# Altium PCB Tigershark 3D R1.2.PcbDoc (part 3 of 3)
Units mil, origin at the board's own origin, x right, y up, seen from the top; angles counter-clockwise.
Board outline 6000 x 4500 mil, 4 copper layers (Top Layer, Groun Plane, Power Plane, Bottom Layer); 257 components, 247 nets, 1014 pads, 620 vias.
Unrouted connection lines stored in the file: 332.
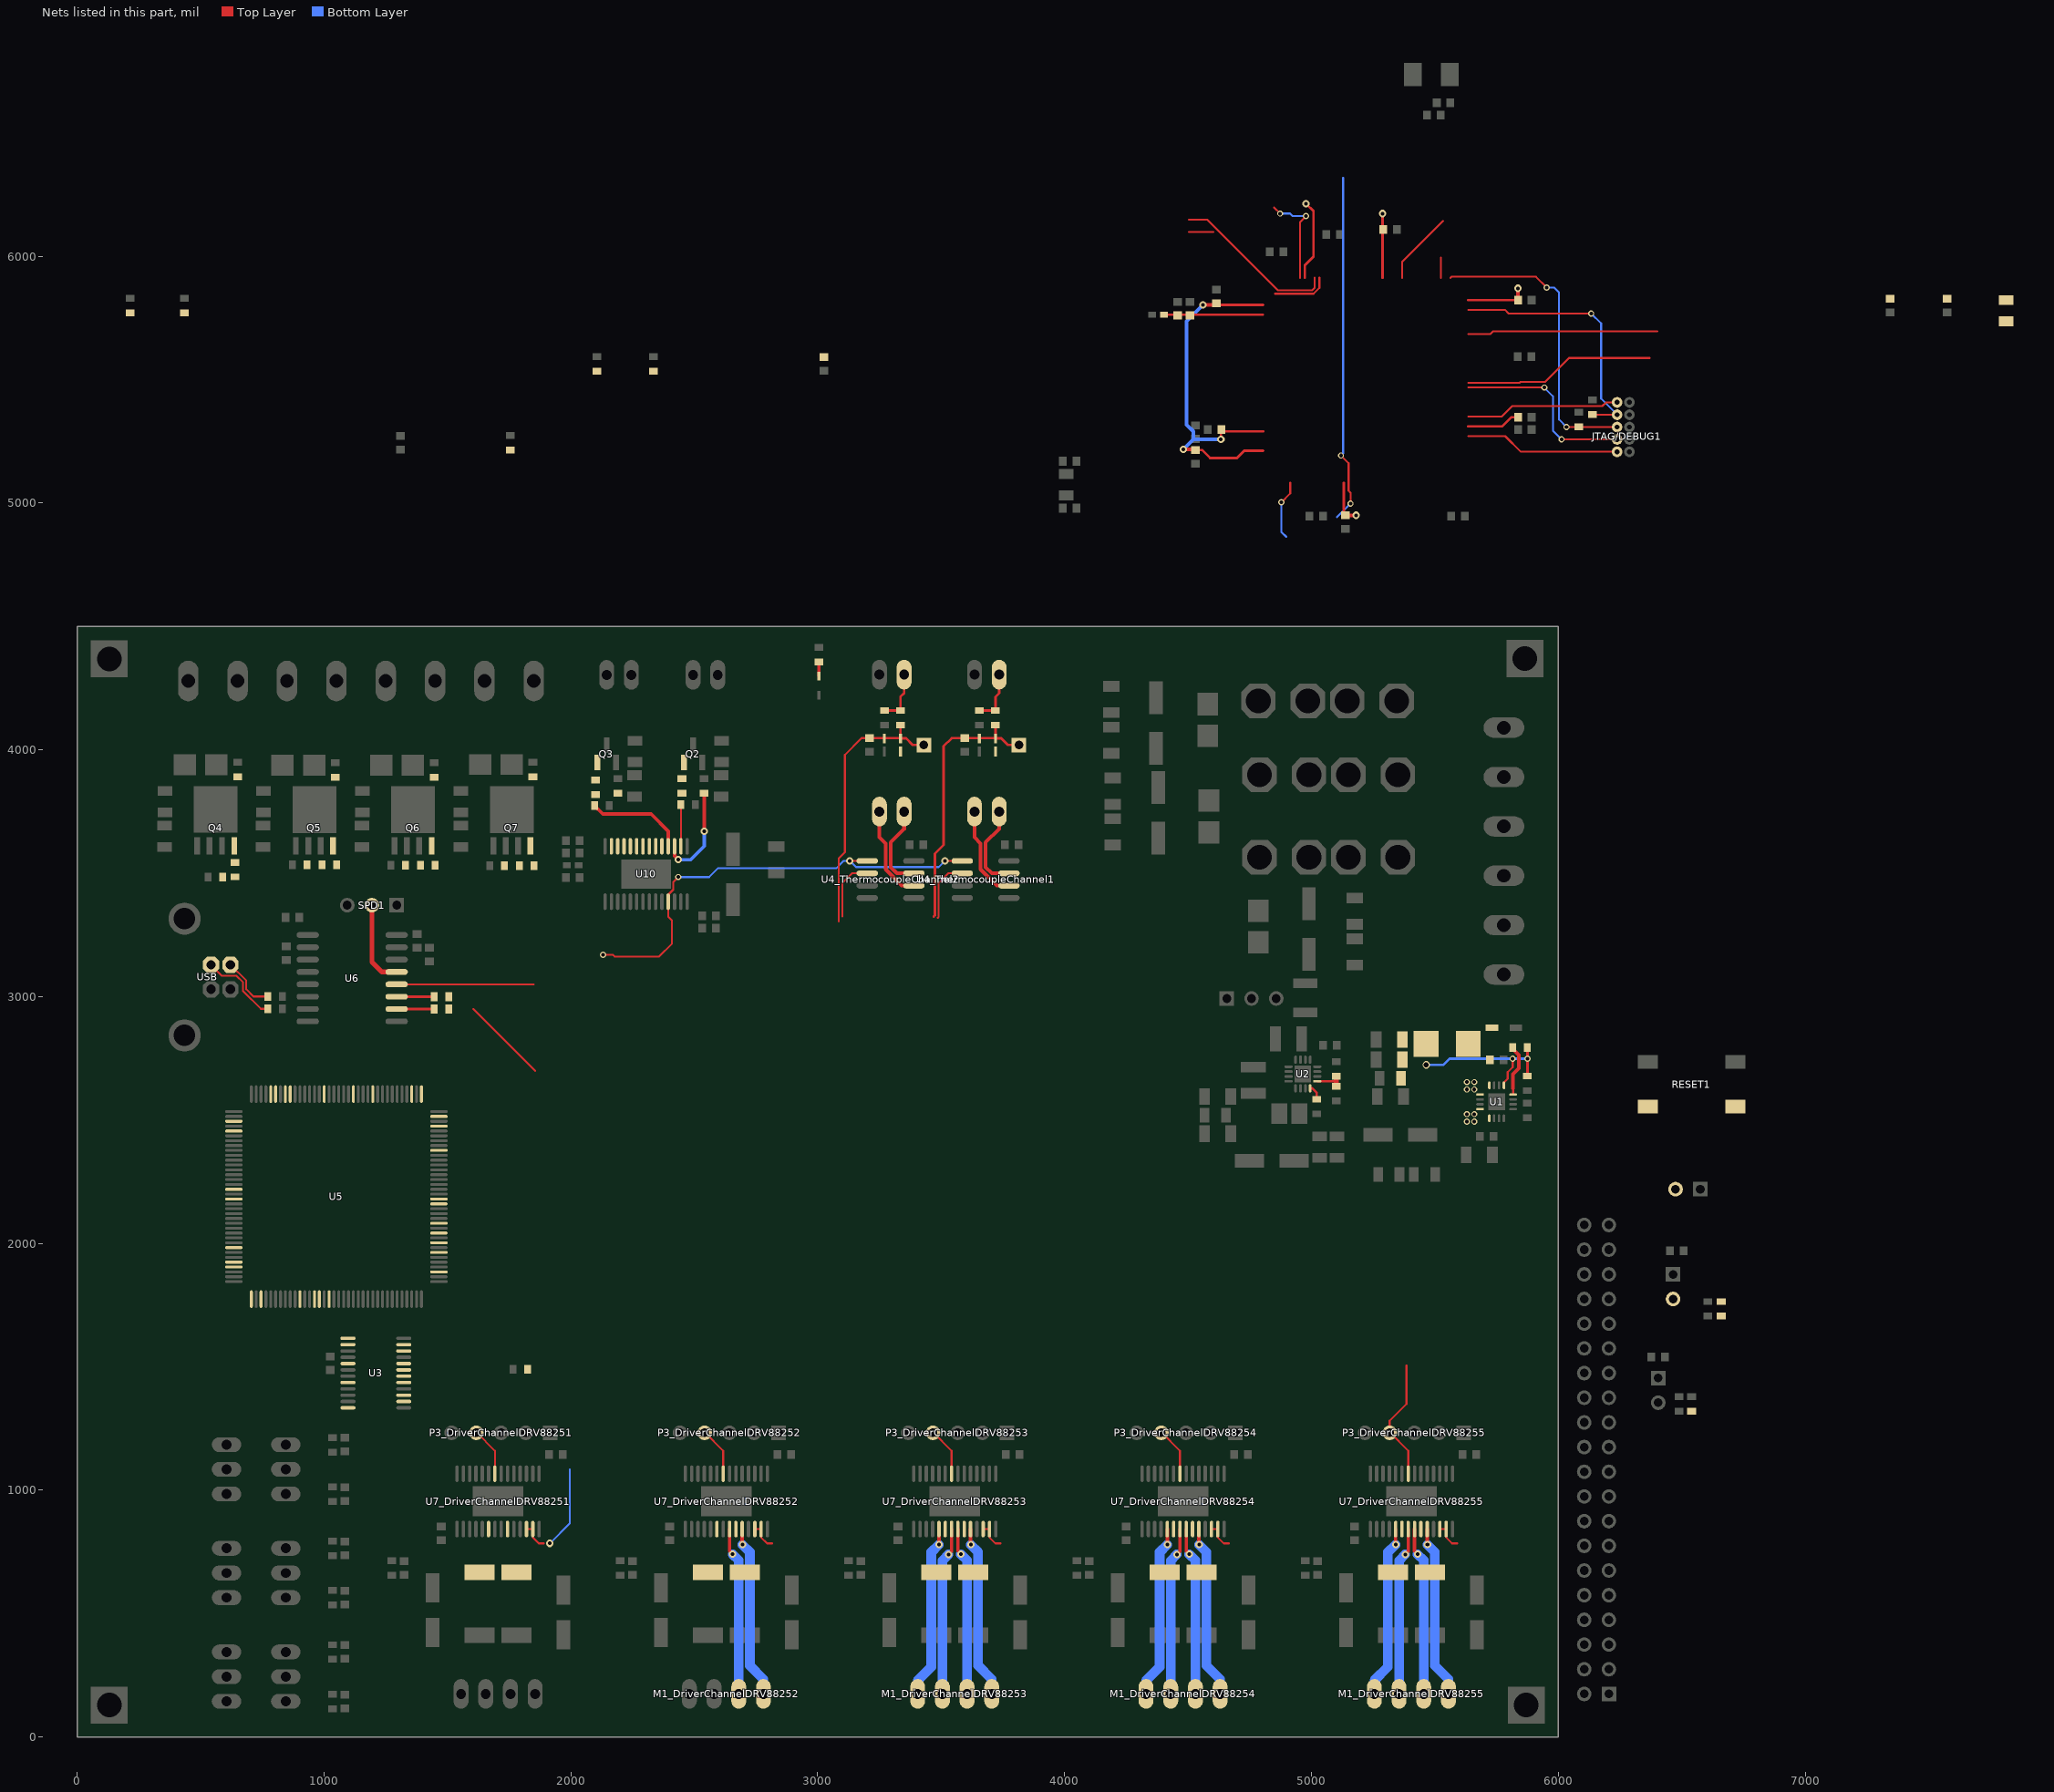
[diagram p5: the nets of this part, all layers, seen from the top]

## Via types
v1: diameter 30, hole 15, Top Layer to Bottom Layer, 351 vias
v2: diameter 25, hole 15, Top Layer to Bottom Layer, 156 vias
v3: diameter 19.68, hole 7.87, Top Layer to Bottom Layer, 90 vias
v4: diameter 50, hole 20, Top Layer to Bottom Layer, 19 vias
v5: diameter 30, hole 20, Top Layer to Bottom Layer, 3 vias
v6: diameter 50, hole 28, Top Layer to Bottom Layer, 1 vias

## Nets (pads, with @x,y where several pads share a name; then routed paths per layer and width w, separated by ;. In a path a pad name is that pad's centre, name@x,y a point inside that pad or via, vN(x,y) a via of type N, cw(c..) or ccw(c..) an arc to the next point about the centre after c; other vN are vias at no path point) (continued)
NetM1_DriverChannelDRV88252_3: M1_DriverChannelDRV88252.3 U7_DriverChannelDRV88252.8 | length 665.9
  Top Layer w14: 2642.8,753.23 U7_DriverChannelDRV88252.8@2642.8,842.8
  Bottom Layer w39: v1(2655,741.02) 2680,716.02 M1_DriverChannelDRV88252.3@2680,175
NetM1_DriverChannelDRV88252_4: M1_DriverChannelDRV88252.4 U7_DriverChannelDRV88252.10 | length 700
  Top Layer w14: v1@2693.98,782.98 U7_DriverChannelDRV88252.10@2693.98,842.8
  Bottom Layer w39: v1(2695,780) 2725,750 2725,290 2780,235 M1_DriverChannelDRV88252.4@2780,175
NetM1_DriverChannelDRV88253_1: M1_DriverChannelDRV88253.1 U7_DriverChannelDRV88253.5 | length 703.4
  Top Layer w14: v1(3491.02,780) U7_DriverChannelDRV88253.5@3491.02,842.8
  Bottom Layer w39: M1_DriverChannelDRV88253.1@3405,175 3405,230 3460,285 3460,748.98 v1(3491.02,780)
NetM1_DriverChannelDRV88253_2: M1_DriverChannelDRV88253.2 U7_DriverChannelDRV88253.7 | length 683.2
  Top Layer w14: v1(3530,740) 3542.2,752.2 U7_DriverChannelDRV88253.7@3542.2,842.8
  Bottom Layer w39: M1_DriverChannelDRV88253.2@3505,175 3505,715 v1(3530,740)
NetM1_DriverChannelDRV88253_3: M1_DriverChannelDRV88253.3 U7_DriverChannelDRV88253.8 | length 665.9
  Top Layer w14: 3567.8,753.23 U7_DriverChannelDRV88253.8@3567.8,842.8
  Bottom Layer w39: v1(3580,741.02) 3605,716.02 M1_DriverChannelDRV88253.3@3605,175
NetM1_DriverChannelDRV88253_4: M1_DriverChannelDRV88253.4 U7_DriverChannelDRV88253.10 | length 700
  Top Layer w14: v1@3618.98,782.98 U7_DriverChannelDRV88253.10@3618.98,842.8
  Bottom Layer w39: v1(3620,780) 3650,750 3650,290 3705,235 M1_DriverChannelDRV88253.4@3705,175
NetM1_DriverChannelDRV88254_1: M1_DriverChannelDRV88254.1 U7_DriverChannelDRV88254.5 | length 703.4
  Top Layer w14: v1(4416.02,780) U7_DriverChannelDRV88254.5@4416.02,842.8
  Bottom Layer w39: M1_DriverChannelDRV88254.1@4330,175 4330,230 4385,285 4385,748.98 v1(4416.02,780)
NetM1_DriverChannelDRV88254_2: M1_DriverChannelDRV88254.2 U7_DriverChannelDRV88254.7 | length 683.2
  Top Layer w14: v1(4455,740) 4467.2,752.2 U7_DriverChannelDRV88254.7@4467.2,842.8
  Bottom Layer w39: M1_DriverChannelDRV88254.2@4430,175 4430,715 v1(4455,740)
NetM1_DriverChannelDRV88254_3: M1_DriverChannelDRV88254.3 U7_DriverChannelDRV88254.8 | length 665.9
  Top Layer w14: 4492.8,753.23 U7_DriverChannelDRV88254.8@4492.8,842.8
  Bottom Layer w39: v1(4505,741.02) 4530,716.02 M1_DriverChannelDRV88254.3@4530,175
NetM1_DriverChannelDRV88254_4: M1_DriverChannelDRV88254.4 U7_DriverChannelDRV88254.10 | length 700
  Top Layer w14: v1@4543.98,782.98 U7_DriverChannelDRV88254.10@4543.98,842.8
  Bottom Layer w39: v1(4545,780) 4575,750 4575,290 4630,235 M1_DriverChannelDRV88254.4@4630,175
NetM1_DriverChannelDRV88255_1: M1_DriverChannelDRV88255.1 U7_DriverChannelDRV88255.5 | length 703.4
  Top Layer w14: v1(5341.02,780) U7_DriverChannelDRV88255.5@5341.02,842.8
  Bottom Layer w39: M1_DriverChannelDRV88255.1@5255,175 5255,230 5310,285 5310,748.98 v1(5341.02,780)
NetM1_DriverChannelDRV88255_2: M1_DriverChannelDRV88255.2 U7_DriverChannelDRV88255.7 | length 683.2
  Top Layer w14: v1(5380,740) 5392.2,752.2 U7_DriverChannelDRV88255.7@5392.2,842.8
  Bottom Layer w39: M1_DriverChannelDRV88255.2@5355,175 5355,715 v1(5380,740)
NetM1_DriverChannelDRV88255_3: M1_DriverChannelDRV88255.3 U7_DriverChannelDRV88255.8 | length 665.9
  Top Layer w14: 5417.8,753.23 U7_DriverChannelDRV88255.8@5417.8,842.8
  Bottom Layer w39: v1(5430,741.02) 5455,716.02 M1_DriverChannelDRV88255.3@5455,175
NetM1_DriverChannelDRV88255_4: M1_DriverChannelDRV88255.4 U7_DriverChannelDRV88255.10 | length 700
  Top Layer w14: v1@5468.98,782.98 U7_DriverChannelDRV88255.10@5468.98,842.8
  Bottom Layer w39: v1(5470,780) 5500,750 5500,290 5555,235 M1_DriverChannelDRV88255.4@5555,175
NetP2_ThermistorChannel1_1: P2_ThermistorChannel1.1 R13_ThermistorChannel1.1 R14_ThermistorChannel1.2 | length 216.7
  Top Layer w10: R13_ThermistorChannel1.1@3655,4159.53 R14_ThermistorChannel1.2@3720,4159.53 3720,4215 3735,4230 P2_ThermistorChannel1.1@3735,4305
NetP2_ThermistorChannel2_1: P2_ThermistorChannel2.1 R13_ThermistorChannel2.1 R14_ThermistorChannel2.2 | length 216.7
  Top Layer w10: R13_ThermistorChannel2.1@3270,4159.53 R14_ThermistorChannel2.2@3335,4159.53 3335,4215 3350,4230 P2_ThermistorChannel2.1@3350,4305
NetQ2_1: Q2.1 R45.2
NetQ3_1: Q3.1 R52.2
NetQ4_4: Q4.4 R58.2
NetQ5_4: Q5.4 R62.2
NetQ6_4: Q6.4 R66.2
NetQ7_4: Q7.4 R70.2
NetR12_1: R12.1 U2.4 | length 60.4
  Top Layer w10: U2.4@4994.98,2628.75 5003.52,2628.75 5021.45,2610.82 R12.1@5021.45,2584.35
NetR14_1: R14.1 U10.3 | length 402.8
  Top Layer w14: U10.3@2420,3609.41 2420,3570 v1(2435,3555) ; v1(2540,3670) R14.1@2540,3824.41
  Bottom Layer w14: v1(2435,3555) 2485,3555 2540,3610 v1(2540,3670)
NetR15_1: R15.1 R16.1 U5.129
NetR17_2: R17.2 U6.10 | length 151.4
  Top Layer w10: U6.10@1294.12,2950 R17.2@1445.47,2950
NetR18_2: R18.2 USB.2 | length 225.2
  Top Layer w8: USB.2@621,3129.21 685,3065.21 685,3030 714,3001 R18.2@772.47,3001
NetR19_2: R19.2 U6.11 | length 151.4
  Top Layer w10: U6.11@1294.12,3000 R19.2@1445.47,3000
NetR20_2: R20.2 USB.3 | length 325
  Top Layer w8: USB.3@542,3129.21 586.21,3085 645.41,3085 671,3059.41 671,3024 744,2951 R20.2@772.47,2951
NetR23_2: R23.2 R28.2 TRST1.2
NetR31_1: R31.1 U3.1 U3.12 U3.15 U3.18 U3.19 U3.22
NetR32_DriverChannelDRV88251_2: R32_DriverChannelDRV88251.2 U7_DriverChannelDRV88251.9
NetR32_DriverChannelDRV88252_2: R32_DriverChannelDRV88252.2 U7_DriverChannelDRV88252.9
NetR32_DriverChannelDRV88253_2: R32_DriverChannelDRV88253.2 U7_DriverChannelDRV88253.9
NetR32_DriverChannelDRV88254_2: R32_DriverChannelDRV88254.2 U7_DriverChannelDRV88254.9
NetR32_DriverChannelDRV88255_2: R32_DriverChannelDRV88255.2 U7_DriverChannelDRV88255.9
NetR33_DriverChannelDRV88251_2: R33_DriverChannelDRV88251.2 U7_DriverChannelDRV88251.6
NetR33_DriverChannelDRV88252_2: R33_DriverChannelDRV88252.2 U7_DriverChannelDRV88252.6
NetR33_DriverChannelDRV88253_2: R33_DriverChannelDRV88253.2 U7_DriverChannelDRV88253.6
NetR33_DriverChannelDRV88254_2: R33_DriverChannelDRV88254.2 U7_DriverChannelDRV88254.6
NetR33_DriverChannelDRV88255_2: R33_DriverChannelDRV88255.2 U7_DriverChannelDRV88255.6
NetR37_1: R37.1 R38.2 U2.5 | length 117.4
  Top Layer w8: U2.5@5023.52,2657.29 5099.98,2657.29
  Top Layer w20: R37.1@5100.45,2636.35 R38.2@5100.45,2677.29
NetR45_1: R45.1 R46.1 U10.2 | length 169.6
  Top Layer w8: R46.1@2445.47,3778.94 2445.59,3778.82 U10.2@2445.59,3609.41
NetR48_1: R48.1 U10.5
NetR52_1: R52.1 R55.1 U10.4 | length 402.9
  Top Layer w14: R55.1@2095.47,3773.94 2129.41,3740 2325,3740 2394.41,3670.59 U10.4@2394.41,3609.41
NetR57_1: R57.1 U10.7
NetR58_1: R58.1 R59.1 U10.6
NetR61_1: R61.1 U10.9
NetR62_1: R62.1 R63.1 U10.8
NetR65_1: R65.1 U10.11
NetR66_1: R66.1 R67.1 U10.10
NetR69_1: R69.1 U10.13
NetR70_1: R70.1 R71.1 U10.12
NetSPD1_2: SPD1.2 U6.13 | length 346.9
  Top Layer w20: SPD1.2@1194.12,3370.88 1194.12,3140.88 1235,3100 U6.13@1294.12,3100
NetT2_ThermocoupleChannel1_1: T2_ThermocoupleChannel1.1 U4_ThermocoupleChannel1.3 | length 351.9
  Top Layer w15: T2_ThermocoupleChannel1.1@3735,3750 3735,3679.49 3680.51,3625 3680.51,3525 3705.51,3500 U4_ThermocoupleChannel1.3@3774.49,3500
NetT2_ThermocoupleChannel1_2: T2_ThermocoupleChannel1.2 U4_ThermocoupleChannel1.2 | length 386.5
  Top Layer w15: T2_ThermocoupleChannel1.2@3635,3750 3635,3645.51 3659.51,3621 3659.51,3516 3725.51,3450 U4_ThermocoupleChannel1.2@3774.49,3450
NetT2_ThermocoupleChannel2_1: T2_ThermocoupleChannel2.1 U4_ThermocoupleChannel2.3 | length 351.9
  Top Layer w15: T2_ThermocoupleChannel2.1@3350,3750 3350,3679.49 3295.51,3625 3295.51,3525 3320.51,3500 U4_ThermocoupleChannel2.3@3389.49,3500
NetT2_ThermocoupleChannel2_2: T2_ThermocoupleChannel2.2 U4_ThermocoupleChannel2.2 | length 386.5
  Top Layer w15: T2_ThermocoupleChannel2.2@3250,3750 3250,3645.51 3274.51,3621 3274.51,3516 3340.51,3450 U4_ThermocoupleChannel2.2@3389.49,3450
NetU5_140: U5.140 U6.12 | length 960.6
  Top Layer w8: U6.12@1294.12,3050 1850,3050 ; 4848.26,6198.02 v2(4873.26,6173.02) ; 4953.61,5913.02 4953.61,6138.38 v2(4978.26,6163.02)
  Bottom Layer w8: v2(4873.26,6173.02) 4913.26,6173.02 4923.26,6163.02 v2(4978.26,6163.02)
OVREF: D1.2 D11_ThermistorChannel1.2 D11_ThermistorChannel2.2 R1.1 | length 56.1
  Top Layer w12: D1.2@3005,4299.37 R1.1@3005,4355.47
PG: R9.2 U1.8 | length 214
  Top Layer w10: U1.8@5816.93,2603.53 5816.93,2629
  Top Layer w15: 5816.93,2629 5816.93,2685.93 5841,2710 5841,2763 5816.93,2787.07 R9.2@5816.93,2797.54
POT_CS: U3.5 U5.39 | length 242.5
  Top Layer w8: v2(4878.26,5003.02) 4914.24,5039.01 4914.24,5082.31
  Bottom Layer w8: v2(4878.26,5003.02) 4878.26,4883.02 4898.26,4863.02
REF1: U3.2 U7_DriverChannelDRV88251.12 U7_DriverChannelDRV88251.13 | length 446.6
  Top Layer w8: U7_DriverChannelDRV88251.12@1820.16,842.8 U7_DriverChannelDRV88251.13@1845.75,842.8 1845.75,809.25 1870,785 1890,785
  Bottom Layer w8: v1(1915,785) 1995,865 1995,1085
REF2: U3.23 U7_DriverChannelDRV88252.12 U7_DriverChannelDRV88252.13 | length 113.4
  Top Layer w8: U7_DriverChannelDRV88252.12@2745.16,842.8 U7_DriverChannelDRV88252.13@2770.75,842.8 2770.75,809.25 2795,785 2815,785
REF3: U3.20 U7_DriverChannelDRV88253.12 U7_DriverChannelDRV88253.13 | length 113.4
  Top Layer w8: U7_DriverChannelDRV88253.12@3670.16,842.8 U7_DriverChannelDRV88253.13@3695.75,842.8 3695.75,809.25 3720,785 3740,785
REF4: U3.17 U7_DriverChannelDRV88254.12 U7_DriverChannelDRV88254.13 | length 113.4
  Top Layer w8: U7_DriverChannelDRV88254.12@4595.16,842.8 U7_DriverChannelDRV88254.13@4620.75,842.8 4620.75,809.25 4645,785 4665,785
REF5: U3.14 U7_DriverChannelDRV88255.12 U7_DriverChannelDRV88255.13 | length 113.4
  Top Layer w8: U7_DriverChannelDRV88255.12@5520.16,842.8 U7_DriverChannelDRV88255.13@5545.75,842.8 5545.75,809.25 5570,785 5590,785
REF_EXP1: U5.53
REF_EXP2: U5.47
RESET: C63.2 JTAG/DEBUG1.10 kRESET.2 R21.1 RESET1.1 U5.83 | length 627.6
  Top Layer w8: 5634.71,5350.03 5770.26,5350.03 5813.26,5393.02 6178.26,5393.02 6193.26,5408.02 JTAG/DEBUG1.10@6238.26,5408.02
RXD1: U5.32
SCLK: U3.8 U4_ThermocoupleChannel1.5 U4_ThermocoupleChannel2.5 U5.51 U10.25 | length 3283.6
  Top Layer w8: v2(2130,3170) 2170.2,3170 2177.43,3162.77 2357.37,3162.77 2409.84,3215.24 2409.84,3308.27 2394.41,3323.7 U10.25@2394.41,3385 2394.41,3413.57 2414.84,3434.01 2414.84,3464.53 v2(2435.16,3484.84) ; v1(3130,3550) U4_ThermocoupleChannel2.5@3200.51,3550 ; v1(3515,3550) U4_ThermocoupleChannel1.5@3585.51,3550 ; v2(5119.36,5192.67) 5150.46,5161.57 5150.46,5082.31 5150.46,5049.98 5158.26,5042.18 v2(5158.26,4998.02)
  Bottom Layer w8: v2(2435.16,3484.84) 2560.04,3484.84 2595.2,3520 3075,3520 3105,3550 v1(3130,3550) 3155,3525 3490,3525 v1(3515,3550) ; 5103.26,4943.02 v2(5158.26,4998.02) ; v2(5119.36,5192.67) 5128.26,5201.57 5128.26,6318.02
STEP1: P3_DriverChannelDRV88251.4 U5.75 U7_DriverChannelDRV88251.22 | length 198.7
  Top Layer w8: P3_DriverChannelDRV88251.4@1617.5,1235 1692.2,1160.3 U7_DriverChannelDRV88251.22@1692.2,1067.2
STEP2: P3_DriverChannelDRV88252.4 U5.90 U7_DriverChannelDRV88252.22 | length 974.5
  Top Layer w8: P3_DriverChannelDRV88252.4@2542.5,1235 2617.2,1160.3 U7_DriverChannelDRV88252.22@2617.2,1067.2 ; 5634.71,5487.83 5843.06,5487.83 5845.76,5490.52 5945.76,5490.52 6043.26,5588.02 6368.97,5588.02
STEP3: P3_DriverChannelDRV88253.4 U5.100 U7_DriverChannelDRV88253.22 | length 970.6
  Top Layer w8: P3_DriverChannelDRV88253.4@3467.5,1235 3542.2,1160.3 U7_DriverChannelDRV88253.22@3542.2,1067.2 ; 5634.71,5684.68 5724.91,5684.68 5736.28,5696.05 6401.85,5696.05
STEP4: P3_DriverChannelDRV88254.4 U5.111 U7_DriverChannelDRV88254.22 | length 280
  Top Layer w8: P3_DriverChannelDRV88254.4@4392.5,1235 4467.2,1160.3 U7_DriverChannelDRV88254.22@4467.2,1067.2 ; 5524.48,5913.02 5524.48,5994.24
STEP5: P3_DriverChannelDRV88255.4 U5.119 U7_DriverChannelDRV88255.22 | length 798.4
  Top Layer w8: P3_DriverChannelDRV88255.4@5317,1233 5317,1282 5385,1350 5385,1505.6 ; P3_DriverChannelDRV88255.4@5317.5,1235 5392.2,1160.3 U7_DriverChannelDRV88255.22@5392.2,1067.2 ; 5367,5913.02 5367,5976.76 5533.26,6143.02
SW: C7.1 D5.2 L1.1 U1.1 U1.12 U1.13 U1.16
  other v2: 5630,2494 5660,2494 5630,2524 5660,2524 5630,2624 5660,2624 5630,2654 5660,2654
SW_OUT: C8.2 C29.1 FB2.1 L1.2 R7.2 R9.1 U1.9 | length 668.1
  Top Layer w8: U1.9@5779.53,2640.93 5779.53,2652.31 5795,2667.79 5795,2694 5815,2714 v2(5815,2749)
  Top Layer w10: R7.2@5875,2673.53 v2(5875,2749) R9.1@5875,2798.53
  Bottom Layer w10: v5(5465,2724) 5535,2724 5560,2749 v2(5875,2749)
TC_CS1: U4_ThermocoupleChannel1.6 | length 254.7
  Top Layer w8: 3485.61,3319.39 3490,3323.79 3490,3460.36 3529.64,3500 U4_ThermocoupleChannel1.6@3585.51,3500
TC_CS2: U4_ThermocoupleChannel2.6 | length 252.1
  Top Layer w8: 3100,3325 3100,3460 3140,3500 U4_ThermocoupleChannel2.6@3200.51,3500
TCK/SWDCLK: JTAG/DEBUG1.4 R25.1 U5.89 | length 772.5
  Top Layer w8: 5634.71,5468.14 v2@5943.26,5468.14 ; v2(6013.26,5258.02) JTAG/DEBUG1.4@6238.26,5258.02
  Bottom Layer w8: v2(5943.26,5468.02) 5978.26,5433.02 5978.26,5293.02 v2(6013.26,5258.02)
TDI: JTAG/DEBUG1.8 R27.1 U5.105 | length 1057.8
  Top Layer w8: 5634.71,5783.1 5783.38,5783.1 5798.46,5768.02 v2(6133.26,5768.02) ; R27.1@6138.26,5358.49 6237.78,5358.49 JTAG/DEBUG1.8@6238.26,5358.02
  Bottom Layer w8: v2(6133.26,5768.02) 6173.26,5728.02 6173.26,5423.02 JTAG/DEBUG1.8@6237.78,5358.49
TDO/SWO: JTAG/DEBUG1.6 R26.1 U5.109 | length 1230.4
  Top Layer w8: 5563.85,5913.02 5567.85,5917.02 5909.26,5917.02 v2(5953.26,5873.02) ; v2(6033.26,5308.02) 6082.78,5308.02 R26.1@6083.26,5308.5 6237.78,5308.5 JTAG/DEBUG1.6@6238.26,5308.02
  Bottom Layer w8: v2(5953.26,5873.02) 5983.26,5873.02 6003.26,5853.02 6003.26,5338.02 v2(6033.26,5308.02)
THERM_AN1: C30_ThermistorChannel1.2 D11_ThermistorChannel1.1 D12_ThermistorChannel1.2 R14_ThermistorChannel1.1 THM_TP1_ThermistorChannel1.1 U5.17 | length 1089
  Top Layer w10: 3470,3325 3475,3330 3475,3580 3510,3615 3510,4015 3542.56,4047.56 C30_ThermistorChannel1.2@3595,4047.56 D11_ThermistorChannel1.1@3719.02,4047.56 ; R14_ThermistorChannel1.1@3720,4100.47 D11_ThermistorChannel1.1@3720,4046.57 3743.43,4046.57 3770,4020 THM_TP1_ThermistorChannel1.1@3815,4020
THERM_AN2: C30_ThermistorChannel2.2 D11_ThermistorChannel2.1 D12_ThermistorChannel2.2 R14_ThermistorChannel2.1 THM_TP1_ThermistorChannel2.1 U5.19 | length 1097.3
  Top Layer w8: 3085,3305 3085,3560 3110,3585 3110,3980 3177.56,4047.56 C30_ThermistorChannel2.2@3210,4047.56
  Top Layer w10: C30_ThermistorChannel2.2@3210,4047.56 D11_ThermistorChannel2.1@3334.02,4047.56 ; R14_ThermistorChannel2.1@3335,4100.47 D11_ThermistorChannel2.1@3335,4046.57 3358.43,4046.57 3385,4020 THM_TP1_ThermistorChannel2.1@3430,4020
TMS/SWDIO: JTAG/DEBUG1.2 R24.1 U5.79 | length 629.7
  Top Layer w8: 5634.71,5271.29 5784.99,5271.29 5848.26,5208.02 JTAG/DEBUG1.2@6238.26,5208.02
TRST: R23.1 U5.85
TXD1: U5.37
UDM_N: R19.1 U5.137 | length 673.4
  Top Layer w8: 4502.78,6148.02 4578.26,6148.02 4864.26,5862.02 5002.46,5862.02 5012.67,5872.23 5012.67,5913.02
UDP_P: R17.1 U5.136 | length 684
  Top Layer w8: 1605,2950 1855,2700 ; 4502.78,6098.02 4603.26,6098.02 ; 4853.26,5848.02 5008.26,5848.02 5032.35,5872.12 5032.35,5913.02
VDDIN: C54.2 C55.2 FB5.2 U5.5 | length 402.3
  Top Layer w8: FB5.2@4401.88,5763.02 4402.27,5763.42 4804,5763.42
VDDOUT: C36.2 C37.2 C38.2 C39.2 C40.2 C41.2 C42.2 FB4.1 U5.3 U5.29 U5.33 U5.50 U5.81 U5.107 U5.123 | length 2441
  Top Layer w10: C39.2@4529.36,5215.23 4556.8,5215.23 4589.36,5182.67 4698.15,5182.67 4727.71,5212.24 4804,5212.24 ; C38.2@4608.61,5802.79 4804,5802.79 ; v1(4633.26,5258.02) C42.2@4633.26,5295.46 ; C42.2@4635.82,5298.02 4642.86,5290.98 4804,5290.98 ; C41.2@5130.78,4947.67 5130.78,5082.31 ; 5288.26,5913.02 v1(5288.26,6173.02) ; 5634.71,5310.66 5772.35,5310.66 5809.36,5347.67 C36.2@5836.8,5347.67 ; 5634.71,5822.47 C40.2@5830.11,5822.47
  Top Layer w15: v1(4481.05,5217.24) C39.2@4528.61,5217.24 ; v1(4561.05,5802.79) C38.2@4608.61,5802.79 ; C41.2@5133.26,4950.58 v1(5180.82,4950.58) ; C40.2@5836.8,5822.67 v1(5836.8,5870.23)
  Bottom Layer w15: v1(4481.05,5217.24) 4521.48,5257.67 ; v1(4561.05,5802.79) 4494.36,5736.09 4494.36,5317.67 4521.48,5290.54 4521.48,5257.67 ; v1@4619.36,5257.67 4521.48,5257.67
VDDPLL: C32.2 C33.2 FB4.2 U5.139 | length 326.9
  Top Layer w10: 4973.3,5913.02 4973.3,5963.06 5008.26,5998.02 5008.26,6183.02 v1(4978.26,6213.02)
pads on no net: JTAG/DEBUG1.1@6319.75,5132.43 JTAG/DEBUG1.7 R22.1 U1.6 U1.7 U3.11 U4_ThermocoupleChannel1.8 U4_ThermocoupleChannel2.8 U5.1 U5.2 U5.4 U5.6 U5.7 U5.10 U5.11 U5.12 U5.13 U5.14 U5.15 U5.16 U5.18 U5.20 U5.21 U5.28 U5.31 U5.34 U5.35 U5.40 U5.41 U5.46 U5.48 U5.54 U5.56 U5.58 U5.59 U5.62 U5.66 U5.67 U5.69 U5.70 U5.124 U5.125 U5.126 U5.127 U5.128 U5.130 U5.131 U5.132 U5.133 U5.144 U7_DriverChannelDRV88251.18 U7_DriverChannelDRV88251.19 U7_DriverChannelDRV88251.23 U7_DriverChannelDRV88251.27 U7_DriverChannelDRV88252.18 U7_DriverChannelDRV88252.19 U7_DriverChannelDRV88252.23 U7_DriverChannelDRV88252.27 U7_DriverChannelDRV88253.18 U7_DriverChannelDRV88253.19 U7_DriverChannelDRV88253.23 U7_DriverChannelDRV88253.27 U7_DriverChannelDRV88254.18 U7_DriverChannelDRV88254.19 U7_DriverChannelDRV88254.23 U7_DriverChannelDRV88254.27 U7_DriverChannelDRV88255.18 U7_DriverChannelDRV88255.19 U7_DriverChannelDRV88255.23 U7_DriverChannelDRV88255.27
copper on no net: | length 49.5
  Bottom Layer w8: 2815,880 2850,845

## Polygon pours and split planes (outlines as drawn)
+12VCC1 on Top Layer "Top Layer-No Net" (solid, remove dead copper, pour order 99): 4950,240 5075,240 5075,530 5210,530 5210,715 5145,715 5145,675 4950,675
+12VCC1 on Top Layer "Top Layer-No Net" (solid, remove dead copper, pour order 100): 4025,240 4150,240 4150,530 4285,530 4285,715 4220,715 4220,675 4025,675
+12VCC1 on Top Layer "Top Layer-No Net" (solid, remove dead copper, pour order 101): 3100,240 3225,240 3225,530 3360,530 3360,715 3295,715 3295,675 3100,675
+12VCC1 on Top Layer "Top Layer-No Net" (solid, remove dead copper, pour order 102): 2175,240 2300,240 2300,530 2435,530 2435,715 2370,715 2370,675 2175,675
+12VCC1 on Top Layer "Top Layer-No Net" (solid, remove dead copper, pour order 103): 1250,240 1375,240 1375,530 1510,530 1510,715 1445,715 1445,675 1250,675
NetD18_1 on Top Layer "Top Layer-No Net" (solid, remove dead copper, pour order 66): 17 vertices, not listed, extent 1520,3575 1900,4460
NetD16_1 on Top Layer "Top Layer-No Net" (solid, remove dead copper, pour order 67): 17 vertices, not listed, extent 1120,3575 1500,4460
NetD14_1 on Top Layer "Top Layer-No Net" (solid, remove dead copper, pour order 68): 17 vertices, not listed, extent 720,3575 1100,4460
NetD12_1 on Top Layer "Top Layer-No Net" (solid, remove dead copper, pour order 69): 17 vertices, not listed, extent 320,3575 700,4460
+12VCC2 on Top Layer "Top Layer-No Net" (solid, remove dead copper, pour order 83): 2465,3665 2465,3525 2470,3530 2925,3530 2925,3665
NetC4_1 on Top Layer "Top Layer-No Net" (solid, remove dead copper, pour order 109): 4906.45,2480.82 4906.45,2572.82 4876.45,2572.82 4876.45,2633.82 4704.45,2633.82 4595,2635 4595,2555 4540,2555 4540,2485 4625,2485 4625,2560 4705,2560 4704.45,2480.82
+12VCC2 on Top Layer "Top Layer-No Net" (solid, remove dead copper, pour order 80): 1710,4460 1525,4460 1525,3815 1665,3815 1665,3890 1710,3890 1710,4460
+12VCC2 on Top Layer "Top Layer-No Net" (solid, remove dead copper, pour order 77): 1310,4460 1125,4460 1125,3815 1265,3815 1265,3890 1310,3890 1310,4460
+12VCC2 on Top Layer "Top Layer-No Net" (solid, remove dead copper, pour order 74): 910,4460 725,4460 725,3815 865,3815 865,3890 910,3890 910,4460
+12VCC3 on Top Layer "Top Layer-No Net" (solid, remove dead copper, pour order 60): 510,4460 325,4460 325,3815 465,3815 465,3890 510,3890 510,4460
+12VCC2 on Top Layer "Top Layer-No Net" (solid, remove dead copper, pour order 112): 17 vertices, not listed, extent 3880,3918 5065,4400
+5VCC on Top Layer "Top Layer-No Net" (solid, remove dead copper, pour order 62): 5325,2250 5145,2250 5145,2420 5205,2420 5205,2700 5325,2700
+12VCC1 on Top Layer "Top Layer-No Net" (solid, remove dead copper, pour order 116): 21 vertices, not listed, extent 4675,2935 5470,3654
3.3VCC on Top Layer "Top Layer-No Net" (solid, remove dead copper, pour order 64): 4625,2550 4625,2400 4540,2400 4540,2300 4815,2300 4815,2415 5065,2415 5065,2470 4700,2470 4700,2550
SW_OUT on Top Layer "Top Layer-No Net" (solid, remove dead copper, pour order 61): 5340,2865 5520,2865 5520,2755 5405,2755 5405,2790 5395,2790 5395,2640 5340,2640
NetR32_DriverChannelDRV88254_2 on Top Layer "Mechanical 15-No Net" (solid, remove dead copper, pour order 82): 4619,645 4491.28,645 4491.28,730 4511,730 4511,864 4524,864 4524,780 4619,718
NetR33_DriverChannelDRV88254_2 on Top Layer "Mechanical 15-No Net" (solid, remove dead copper, pour order 73): 4342,645 4470,645 4470,720 4448,720 4448,754.96 4448.01,861 4436,861 4436,770 4342,721
+12VCC1 on Top Layer "Top Layer-No Net" (solid, remove dead copper, pour order 94): 4675,715 4925,715 4925,240 4745,240 4745,285 4800,285 4800,530 4675,530
NetR32_DriverChannelDRV88255_2 on Top Layer "Mechanical 15-No Net" (solid, remove dead copper, pour order 84): 5544,645 5416.28,645 5416.28,730 5436,730 5436,864 5449,864 5449,780 5544,718
NetR33_DriverChannelDRV88255_2 on Top Layer "Mechanical 15-No Net" (solid, remove dead copper, pour order 75): 5267,645 5395,645 5395,720 5373,720 5373,754.96 5373.01,861 5361,861 5361,770 5267,721
+12VCC1 on Top Layer "Top Layer-No Net" (solid, remove dead copper, pour order 95): 5600,715 5850,715 5850,240 5670,240 5670,285 5725,285 5725,530 5600,530
NetR32_DriverChannelDRV88252_2 on Top Layer "Mechanical 15-No Net" (solid, remove dead copper, pour order 85): 2769,645 2641.28,645 2641.28,730 2661,730 2661,864 2674,864 2674,780 2769,718
NetR33_DriverChannelDRV88252_2 on Top Layer "Mechanical 15-No Net" (solid, remove dead copper, pour order 76): 2492,645 2620,645 2620,720 2598,720 2598,754.96 2598.01,861 2586,861 2586,770 2492,721
+12VCC1 on Top Layer "Top Layer-No Net" (solid, remove dead copper, pour order 96): 2825,715 3075,715 3075,240 2895,240 2895,285 2950,285 2950,530 2825,530
NetR32_DriverChannelDRV88253_2 on Top Layer "Mechanical 15-No Net" (solid, remove dead copper, pour order 86): 3694,645 3566.28,645 3566.28,730 3586,730 3586,864 3599,864 3599,780 3694,718
NetR33_DriverChannelDRV88253_2 on Top Layer "Mechanical 15-No Net" (solid, remove dead copper, pour order 78): 3417,645 3545,645 3545,720 3523,720 3523,754.96 3523.01,861 3511,861 3511,770 3417,721
+12VCC1 on Top Layer "Top Layer-No Net" (solid, remove dead copper, pour order 97): 3750,715 4000,715 4000,240 3820,240 3820,285 3875,285 3875,530 3750,530
+12VCC1 on Top Layer "Top Layer-No Net" (solid, remove dead copper, pour order 98): 1900,715 2150,715 2150,240 1970,240 1970,285 2025,285 2025,530 1900,530
NetF3_1 on Top Layer "Top Layer-No Net" (solid, remove dead copper, pour order 118): 5955,3184 5955,3574 5490,3574 5490,3669 5080,3669 5080,3469 5260,3469 5260,3359 5445,3359 5445,3299 5500,3299 5500,3184
NetF1_1 on Top Layer "Top Layer-No Net" (solid, remove dead copper, pour order 114): 5970,3584 5970,4004 5075,4004 5075,3674 5500,3674 5500,3584
NetF2_1 on Top Layer "Top Layer-No Net" (solid, remove dead copper, pour order 111): 5085,4304 5085,4009 5970,4009 5970,4224 5745,4224 5745,4304
+12VCC3 on Top Layer "Top Layer-No Net" (solid, remove dead copper, pour order 115): 18 vertices, not listed, extent 3880,3564 5080,3990.39
NetC22_1 on Top Layer "Top Layer-No Net" (solid, remove dead copper, pour order 104): 4982.45,2912.55 4983.45,2728.82 4928.45,2728.82 4928.45,2710.82 4889.45,2710.82 4889.45,2761.82 4938.45,2761.82 4937.45,2912.55 4917.45,2912.55 4917.45,2957.55 5027.45,2957.55 5027.45,2912.55
NetR33_DriverChannelDRV88251_2 on Top Layer "Mechanical 15-No Net" (solid, remove dead copper, pour order 79): 1567,645 1695,645 1695,720 1673,720 1673,754.96 1673.01,861 1661,861 1661,770 1567,721
NetR32_DriverChannelDRV88251_2 on Top Layer "Mechanical 15-No Net" (solid, remove dead copper, pour order 87): 1844,645 1716.28,645 1716.28,730 1736,730 1736,864 1749,864 1749,780 1844,718
+12VCC1 on Top Layer "Mechanical 15-No Net" (solid, pour order 70): 5735,2529 5765,2529 5765,2469 5875,2469 5875,2319 5710,2319 5710,2404 5720,2404 5720,2469 5735,2469
SW on Top Layer "Mechanical 15-No Net" (solid, pour order 81): 5725,2474 5725,2539 5710,2539 5710,2549 5610,2549 5610,2474
GND on Top Layer "Mechanical 15-No Net" (solid, pour order 88): 5710,2559 5710,2589 5570,2589 5570,2314 5665,2314 5665,2404 5700,2404 5700,2469 5605,2469 5605,2559
+12VCC1 on Top Layer "Mechanical 15-No Net" (solid, remove dead copper, pour order 71): 5730,2619 5750,2619 5750,2654 5760,2654 5760,2719 5720,2719 5720,2654 5730,2654
SW on Top Layer "Mechanical 15-No Net" (solid, pour order 72): 17 vertices, not listed, extent 5580,2599 5765,2894
NetL2_1 on Top Layer "Top Layer-No Net" (solid, remove dead copper, pour order 105): 4983.45,2644.82 4927.45,2644.82 4927.45,2486.82 4983.45,2486.82
NetC24_2 on Top Layer "Top Layer-No Net" (solid, remove dead copper, pour order 107): 5000.45,2731.82 4990.45,2731.82 4990.45,2756.82 4990.45,2821.82 5065.45,2821.82 5065.45,2781.82 5000.45,2781.82
GND on Top Layer "Top Layer-No Net" (solid, remove dead copper, pour order 106): 4935.45,2682.82 4935.45,2652.82 4704.45,2652.82 4704.45,2886.82 4880.45,2886.82 4880.45,2770.82 4839.45,2770.82 4839.45,2682.82
GND on Top Layer "Top Layer-No Net" (solid, remove dead copper, pour order 108): 5118.45,2884.82 4991.45,2884.82 4991.45,2829.82 5077.45,2829.82 5077.45,2722.82 4997.45,2722.82 4997.45,2668.82 5046.45,2668.82 5046.45,2697.82 5118.45,2697.82
GND on Top Layer "Top Layer-No Net" (solid, remove dead copper, pour order 93): 1250,1115 1545,1115 1545,1025 1900,1025 1900,1115 2150,1115 2150,810 1860,810 1860,885 1515,885 1505,875 1430,875 1430,810 1250,810
GND on Top Layer "Top Layer-No Net" (solid, remove dead copper, pour order 92): 2175,1115 2470,1115 2470,1025 2825,1025 2825,1115 3075,1115 3075,810 2785,810 2785,885 2440,885 2430,875 2355,875 2355,810 2175,810
GND on Top Layer "Top Layer-No Net" (solid, remove dead copper, pour order 91): 3100,1115 3395,1115 3395,1025 3750,1025 3750,1115 4000,1115 4000,810 3710,810 3710,885 3365,885 3355,875 3280,875 3280,810 3100,810
GND on Top Layer "Top Layer-No Net" (solid, remove dead copper, pour order 90): 4025,1115 4320,1115 4320,1025 4675,1025 4675,1115 4925,1115 4925,810 4635,810 4635,885 4290,885 4280,875 4205,875 4205,810 4025,810
GND on Top Layer "Top Layer-No Net" (solid, remove dead copper, pour order 89): 4950,1115 5245,1115 5245,1025 5600,1025 5600,1115 5850,1115 5850,810 5560,810 5560,885 5215,885 5205,875 5130,875 5130,810 4950,810
NetF3_1 on Bottom Layer "Top Layer-No Net" (solid, remove dead copper, pour order 117): 5955,3184 5955,3574 5490,3574 5490,3669 5080,3669 5080,3469 5260,3469 5260,3359 5445,3359 5445,3299 5500,3299 5500,3184
NetF1_1 on Bottom Layer "Top Layer-No Net" (solid, remove dead copper, pour order 113): 5970.22,3584 5970.22,4004 5075.22,4004 5075.22,3674 5500.22,3674 5500.22,3584
NetF2_1 on Bottom Layer "Top Layer-No Net" (solid, remove dead copper, pour order 110): 5085,4303 5085,4008 5970,4008 5970,4223 5745,4223 5745,4303
SW on Bottom Layer "Mechanical 15-No Net" (solid, pour order 65): 5690,2674 5690,2474 5610,2474 5610,2674
+12VCC1 on Bottom Layer "Mechanical 15-No Net" (solid, pour order 63): 5751.79,2404 5751.79,2464 5800,2464 5800,2654 5725,2654 5725,2719 5875,2719 5875,2404
INPUT_GND on Groun Plane (split plane): 1019.9,3297.89 1019.9,2755.1 20.1,2755.1 20.1,3414.9 902.89,3414.9
GND on Groun Plane (split plane): 19 vertices, not listed, extent 20.1,20.1 5979.9,4479.9
3.3VCC on Power Plane (split plane): 57 vertices, not listed, extent 4933.29,3502.29 5056.71,3625.71
+5VCC on Power Plane (split plane): 5564.9,2245.1 5130.1,2245.1 5130.1,2417.89 5148.6,2436.4 5149.71,2438.05 5150.1,2440 5150.1,2928.9 5564.9,2928.9
3.3VCC on Power Plane (split plane): 57 vertices, not listed, extent 4928.29,3837.29 5051.71,3960.71
3.3VCC on Power Plane (split plane): 5754.9,2662.1 5725.1,2662.1 5725.1,2715.9 5754.9,2715.9
3.3VCC on Power Plane (split plane): 49 vertices, not listed, extent 5430.98,2689.98 5499.02,2758.02
3.3VCC on Power Plane (split plane): 57 vertices, not listed, extent 4923.29,4137.29 5046.71,4260.71
3.3VCC on Power Plane (split plane): 57 vertices, not listed, extent 4723.29,4137.29 4846.71,4260.71
3.3VCC on Power Plane (split plane): 57 vertices, not listed, extent 4733.29,3502.29 4856.71,3625.71
3.3VCC on Power Plane (split plane): 57 vertices, not listed, extent 4728.29,3837.29 4851.71,3960.71
3.3VCC on Power Plane (split plane): 49 vertices, not listed, extent 5512.01,727.01 5587.99,802.99
3.3VCC on Power Plane (split plane): 49 vertices, not listed, extent 5222.01,732.01 5297.99,807.99
3.3VCC on Power Plane (split plane): 49 vertices, not listed, extent 5582.01,657.01 5657.99,732.99
3.3VCC on Power Plane (split plane): 49 vertices, not listed, extent 5142.01,657.01 5217.99,732.99
3.3VCC on Power Plane (split plane): 49 vertices, not listed, extent 4587.01,727.01 4662.99,802.99
3.3VCC on Power Plane (split plane): 49 vertices, not listed, extent 4297.01,732.01 4372.99,807.99
3.3VCC on Power Plane (split plane): 49 vertices, not listed, extent 4657.01,657.01 4732.99,732.99
3.3VCC on Power Plane (split plane): 49 vertices, not listed, extent 4217.01,657.01 4292.99,732.99
+12VCC2 on Power Plane (split plane): 5979.9,4070.1 570.1,4070.1 570.1,4479.9 5979.9,4479.9
+12VCC3 on Power Plane (split plane): 31 vertices, not listed, extent 20.1,3190.1 4424.9,4479.9
3.3VCC on Power Plane (split plane): 49 vertices, not listed, extent 3662.01,727.01 3737.99,802.99
3.3VCC on Power Plane (split plane): 49 vertices, not listed, extent 3372.01,732.01 3447.99,807.99
3.3VCC on Power Plane (split plane): 49 vertices, not listed, extent 2447.01,732.01 2522.99,807.99
3.3VCC on Power Plane (split plane): 49 vertices, not listed, extent 1522.01,732.01 1597.99,807.99
3.3VCC on Power Plane (split plane): 49 vertices, not listed, extent 2737.01,727.01 2812.99,802.99
3.3VCC on Power Plane (split plane): 49 vertices, not listed, extent 1812.01,727.01 1887.99,802.99
+12VCC1 on Power Plane (split plane): 18 vertices, not listed, extent 1230.1,20.1 5979.9,3423.9
3.3VCC on Power Plane (split plane): 54 vertices, not listed, extent 20.1,20.1 5979.9,4059.9
3.3VCC on Power Plane (split plane): 49 vertices, not listed, extent 3732.01,657.01 3807.99,732.99
3.3VCC on Power Plane (split plane): 49 vertices, not listed, extent 3292.01,657.01 3367.99,732.99
3.3VCC on Power Plane (split plane): 49 vertices, not listed, extent 1882.01,657.01 1957.99,732.99
3.3VCC on Power Plane (split plane): 49 vertices, not listed, extent 1442.01,657.01 1517.99,732.99
3.3VCC on Power Plane (split plane): 49 vertices, not listed, extent 2807.01,657.01 2882.99,732.99
3.3VCC on Power Plane (split plane): 49 vertices, not listed, extent 2367.01,657.01 2442.99,732.99

## Keep-outs
Keep-Out Layer:
  lines w10: 25,25 25,4475 5975,4475 5975,25 25,25

## Other copper
Groun Plane (plane layer: these items are gaps in the copper):
  lines w10: 0,2750 1025,2750 1025,3300 905,3420 0,3420
Power Plane (plane layer: these items are gaps in the copper):
  circle w10: c4795,3564 r66.71
  circle w10: c4995,3564 r66.71
  circle w10: c4790,3899 r66.71
  circle w10: c4990,3899 r66.71
  circle w10: c4985,4199 r66.71
  circle w10: c4785,4199 r66.71
  circle w10: c5465,2724 r39.05
  circle w10: c5180,695 r43.01
  circle w10: c5260,770 r43.01
  circle w10: c5550,765 r43.01
  circle w10: c5620,695 r43.01
  circle w10: c4255,695 r43.01
  circle w10: c4335,770 r43.01
  circle w10: c4625,765 r43.01
  circle w10: c4695,695 r43.01
  circle w10: c3330,695 r43.01
  circle w10: c3410,770 r43.01
  circle w10: c3700,765 r43.01
  circle w10: c3770,695 r43.01
  circle w10: c2405,695 r43.01
  circle w10: c2485,770 r43.01
  circle w10: c2775,765 r43.01
  circle w10: c2845,695 r43.01
  circle w10: c1920,695 r43.01
  circle w10: c1850,765 r43.01
  circle w10: c1560,770 r43.01
  circle w10: c1480,695 r43.01
  lines w10: -5,3665 2490,3665 2490,3545 2765,3545 3005,3545 3005,3665 3760,3665 3850,3575 3850,3185 4430,3185 4430,4065 3785,4065 565,4065 565,4490 555,4500 ; 1225,0 1225,1025 5570,1025 5570,2934 5145,2934 ; 4425,4065 5995,4065 ; 5570,2240 5125,2240 5125,2420 5145,2440 5145,2934 ; 6005,3429 5145,3429 5145,2934 ; 5720,2657 5760,2657 5760,2721 5720,2721 5720,2657

## Silkscreen, mask and mechanical layers (free items; w line width, h text height)
Top Overlay:
  lines w6: 325,4130 325,4025 750,4025 ; 750,4125 750,4025 ; 1150,4130 1150,4025 ; 1550,4130 1550,4025 ; 1975,4130 1975,4025 1550,4025 ; 5630,2965 5480,2965 5480,3390 ; 5630,3390 5480,3390 ; 5630,3790 5480,3790 ; 5630,4215 5480,4215 5480,3790 ; 750,4025 1150,4025 ; 1150,4025 1550,4025 ; 5480,3390 5480,3790
  lines w10: 40,40 40,220 220,220 220,40 195,40 40,40 ; 40,4278.94 40,4458.94 220,4458.94 220,4278.94 195,4278.94 40,4278.94 ; 5775,4280 5775,4460 5955,4460 5955,4280 5930,4280 5775,4280 ; 5780,40 5960,40 5960,195 5960,220 5780,220 5780,40
  text "MOSFETS" at 4665,4314 h120
  text "FAN-0" at 2040,4100 h120
  text "FAN-1" at 2390,4100 h120
  text "HEAT-1" at 1205,4050 h100
  text "HEAT-2" at 1620,4050 h100
  text "HEATBED" at 360,4045 h100
  text "HEAT-0" at 805,4045 h100
  text "HEATBED" at 4670,4014 h120
  text "PWR IN 3" at 5550,3845 h90 r90
  text "12V - 24V" at 5615,3845 h90 r90
  text "MOTORS/LOGIC" at 4675,3689 h120
  text "Tigershark 3D" at 7160,3475 h250
  text "PWR IN 2" at 5550,3435 h90 r90
  text "12V - 24V" at 5615,3435 h90 r90
  text "Open Source 3D Printer Controller" at 6985,3355 h140
  text "PWR IN 1" at 5550,3010 h90 r90
  text "12V - 24V" at 5615,3010 h90 r90
  text "S" at 7365,2995 h175
  text "Z" at 7760,2995 h75
  text "G" at 8150,2995 h325
  text "3.3V 2A" at 4760,2150 h100
  text "5V 3A" at 5390,2150 h100
  text "ENDSTOPS" at 480,1340 h120
  text "GND" at 1545,1305 h100 r90
  text "STEP" at 1645,1305 h100 r90
  text "EN" at 1745,1305 h100 r90
  text "DIR" at 1845,1305 h100 r90
  text "3.3V" at 1945,1305 h100 r90
  text "GND" at 2470,1305 h100 r90
  text "STEP" at 2570,1305 h100 r90
  text "EN" at 2670,1305 h100 r90
  text "DIR" at 2770,1305 h100 r90
  text "3.3V" at 2870,1305 h100 r90
  text "GND" at 3400,1305 h100 r90
  text "STEP" at 3500,1305 h100 r90
  text "EN" at 3600,1305 h100 r90
  text "DIR" at 3700,1305 h100 r90
  text "3.3V" at 3800,1305 h100 r90
  text "GND" at 5245,1305 h100 r90
  text "STEP" at 5345,1305 h100 r90
  text "EN" at 5445,1305 h100 r90
  text "DIR" at 5545,1305 h100 r90
  text "3.3V" at 5645,1305 h100 r90
  text "GND" at 4325,1300 h100 r90
  text "STEP" at 4425,1300 h100 r90
  text "EN" at 4525,1300 h100 r90
  text "DIR" at 4625,1300 h100 r90
  text "3.3V" at 4725,1300 h100 r90
  text "X" at 280,1000 h300
  text "Y" at 290,575 h300
  text "STEPPER DRIVERS" at 5955,245 h120 r90
  text "Z" at 295,125 h300
  text "X" at 1290,50 h300
  text "Y" at 2215,50 h300
  text "Z" at 3150,50 h300
  text "E0" at 3925,50 h300
  text "E1" at 4850,50 h300
Bottom Overlay:
  text "Tigershark 3D" at 8805,2325 h250
  text "G" at 8040,1970 h325
  text "S" at 8420,1955 h175
  text "Z" at 8815,1955 h75
  text "Based On the Work of Ultimachine," at 8830,1825 h140
  text "Arduino, RepRap, and Synthetos.com" at 8830,1710 h140
  text "Codeveloped By Adam Vadala-Roth" at 8830,1595 h140
  text "& Johnny Russel" at 8830,1480 h140
  text "PCB Designed By Adam Vadala-Roth" at 8830,1365 h140
Mechanical 15:
  lines w10: 0,0 6000,0 6000,500 6000,4500 0,4500 0,500 0,0

## Text inside footprints (layer, text, board x,y; h text height)
EXP0: Top Overlay "39" at 6225,2155 h50 r90; Top Overlay "40" at 6125,2155 h50 r90; Top Overlay "2" at 6125,75 h50 r90; Top Overlay "1" at 6225,75 h50 r90
FAN-1: Mechanical 16 "1" at 2657.5,4366.44 h62 r180
FAN-2: Mechanical 16 "1" at 2307.5,4366.44 h62 r180
FETS: Top Overlay "8" at 1750,4193.94 h77.5; Top Overlay "7" at 1550,4193.94 h77.5; Top Overlay "6" at 1350,4193.94 h77.5; Top Overlay "5" at 1150,4193.94 h77.5; Top Overlay "1" at 365,4193.94 h77.5; Top Overlay "2" at 550,4193.94 h77.5; Top Overlay "3" at 750,4193.94 h77.5; Top Overlay "4" at 950,4193.94 h77.5
MAX1_EndstopChannel1: Mechanical 16 "1" at 542.5,1247.5 h62 r270
MAX1_EndstopChannel2: Mechanical 16 "1" at 542.5,407.5 h62 r270
MAX1_EndstopChannel3: Mechanical 16 "1" at 542.5,827.5 h62 r270
MIN1_EndstopChannel1: Mechanical 16 "1" at 907.5,922.5 h62 r90
MIN1_EndstopChannel2: Mechanical 16 "1" at 907.5,82.5 h62 r90
MIN1_EndstopChannel3: Mechanical 16 "1" at 907.5,502.5 h62 r90
P2_ThermistorChannel1: Mechanical 16 "1" at 3797.5,4367.5 h62 r180
P2_ThermistorChannel2: Mechanical 16 "1" at 3412.5,4367.5 h62 r180
"Power Input1": Top Overlay "4" at 5695,3590 h77.5 r270; Top Overlay "3" at 5695,3790 h77.5 r270; Top Overlay "2" at 5695,3990 h77.5 r270; Top Overlay "1" at 5695,4175 h77.5 r270; Top Overlay "5" at 5695,3390 h77.5 r270; Top Overlay "6" at 5695,3190 h77.5 r270
T2_ThermocoupleChannel1: Mechanical 16 "1" at 3797.5,3812.5 h62 r180
T2_ThermocoupleChannel2: Mechanical 16 "1" at 3412.5,3812.5 h62 r180
U5: Top Overlay "R" at 1197.27,2138.56 h37.2; Top Overlay "TQFP 144" at 952.64,2083.05 h49.6